# Altium PCB PCB layout.PcbDoc
Units mm, origin at the board's own origin, x right, y up, seen from the top; angles counter-clockwise.
Board outline 33.6 x 33.6 mm, 6 copper layers (Layer 1, Layer 2, Layer 3, Layer 4, Layer 5, Layer 6), stack 1.538 mm thick; 41 components, 40 nets, 194 pads, 107 vias.
Unrouted connection lines stored in the file: 41.
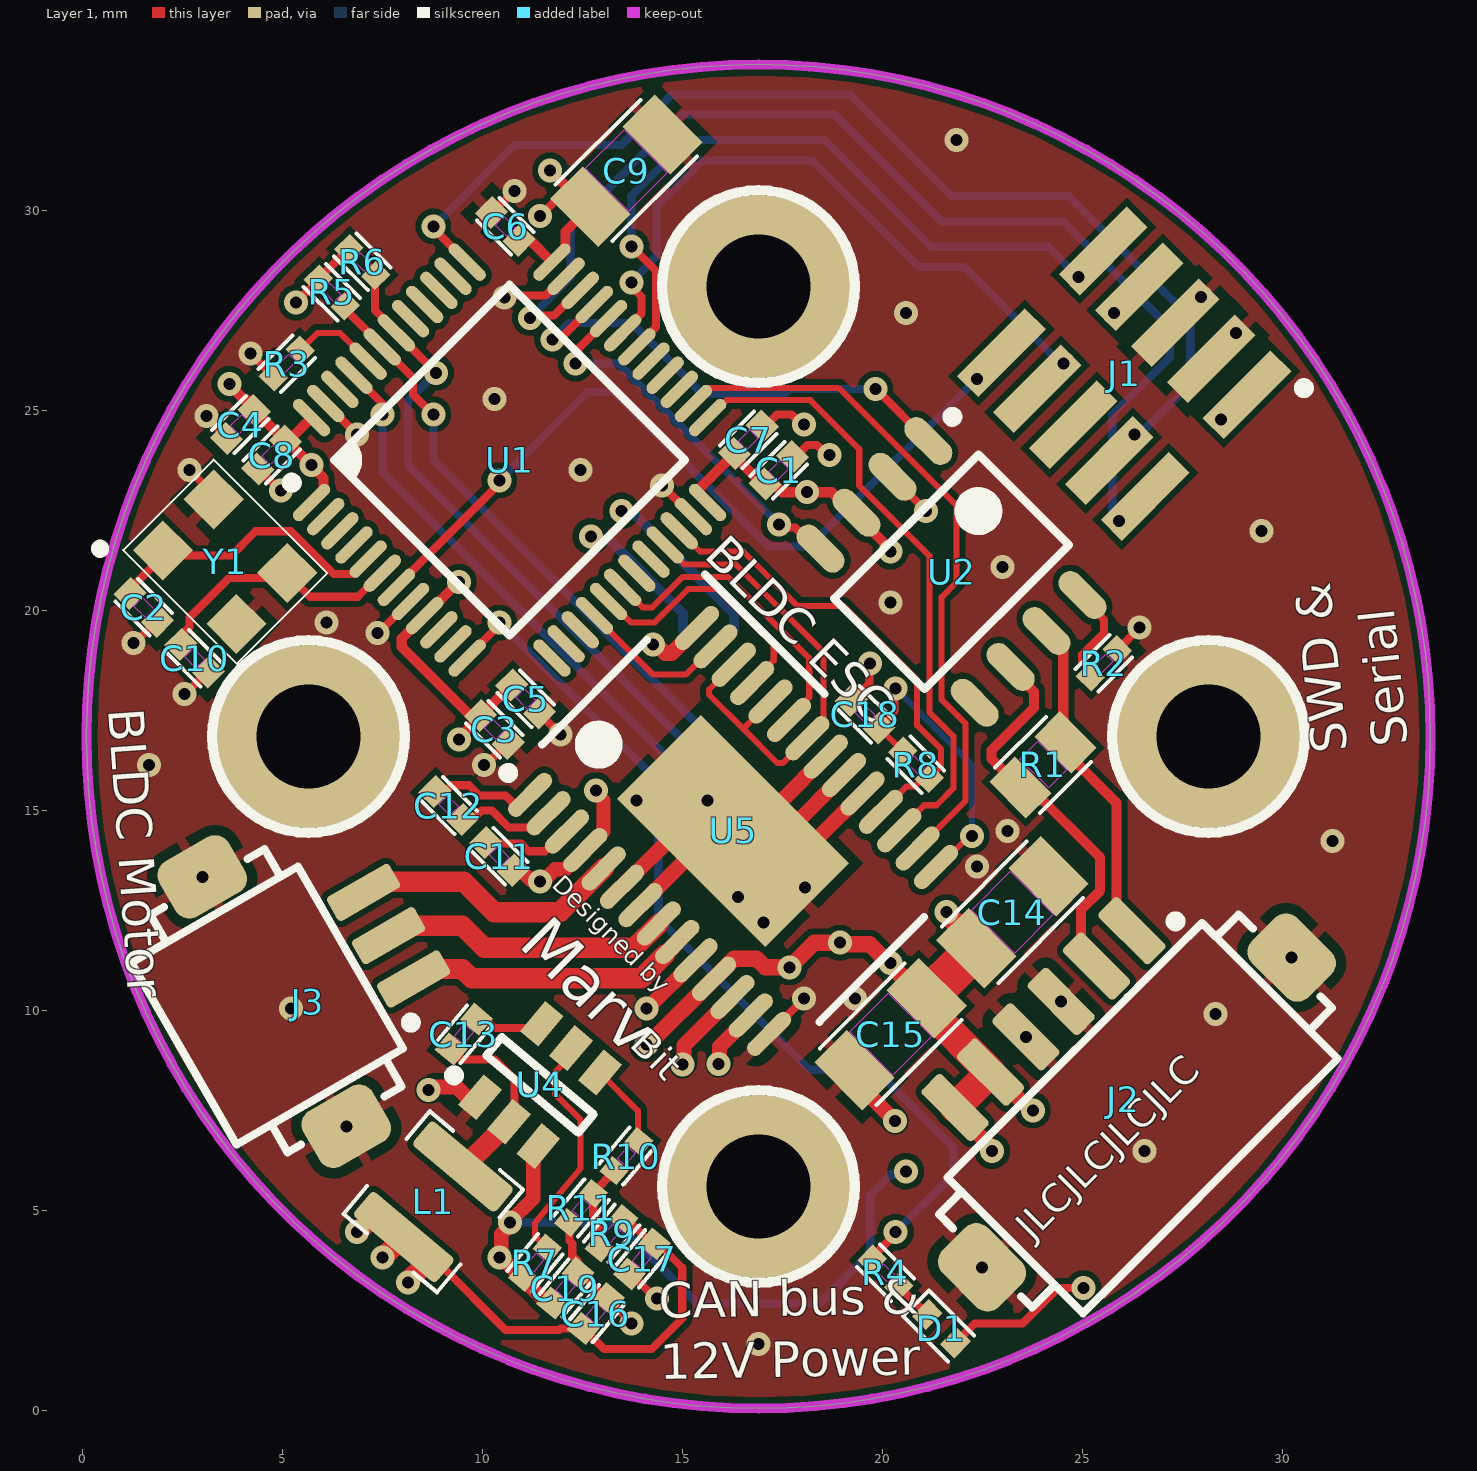
[diagram p0: Layer 1 view]
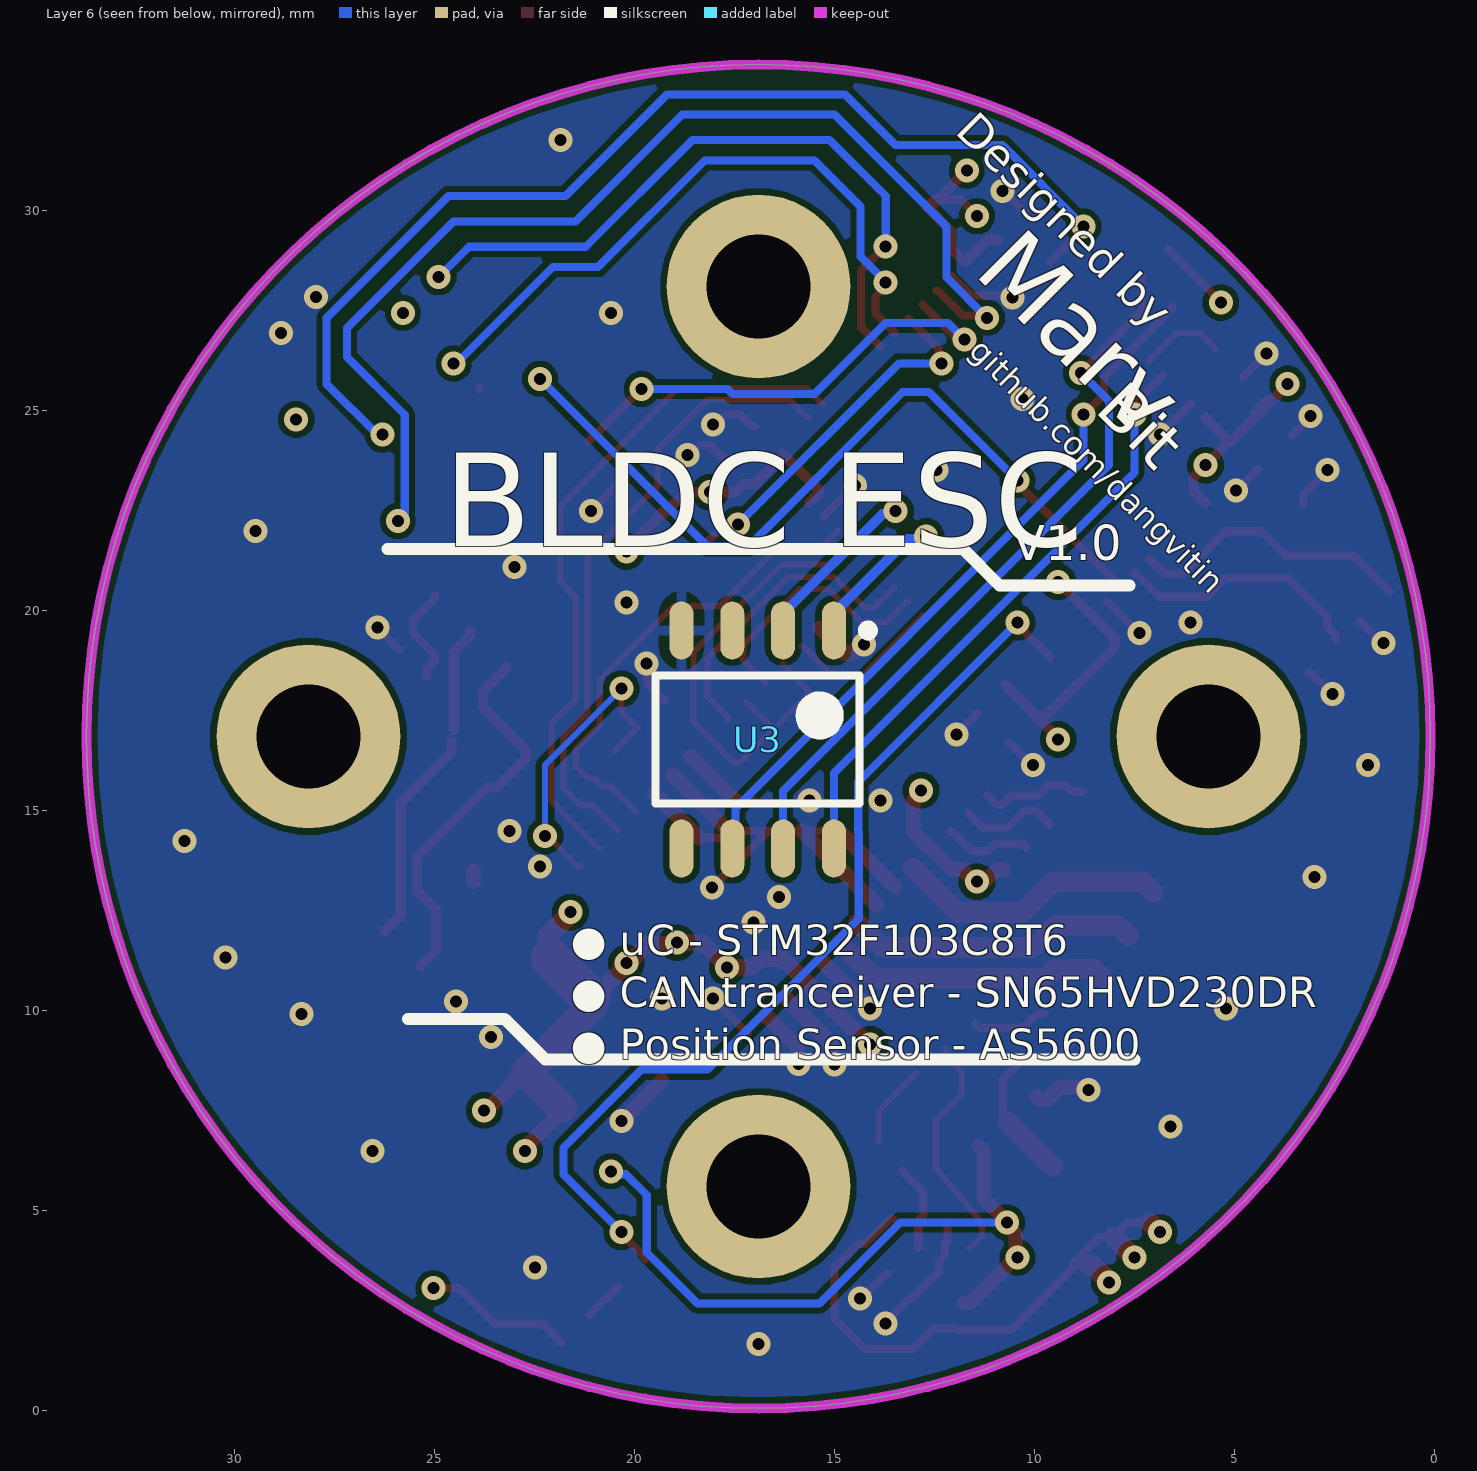
[diagram p1: Layer 6 view, seen from below]
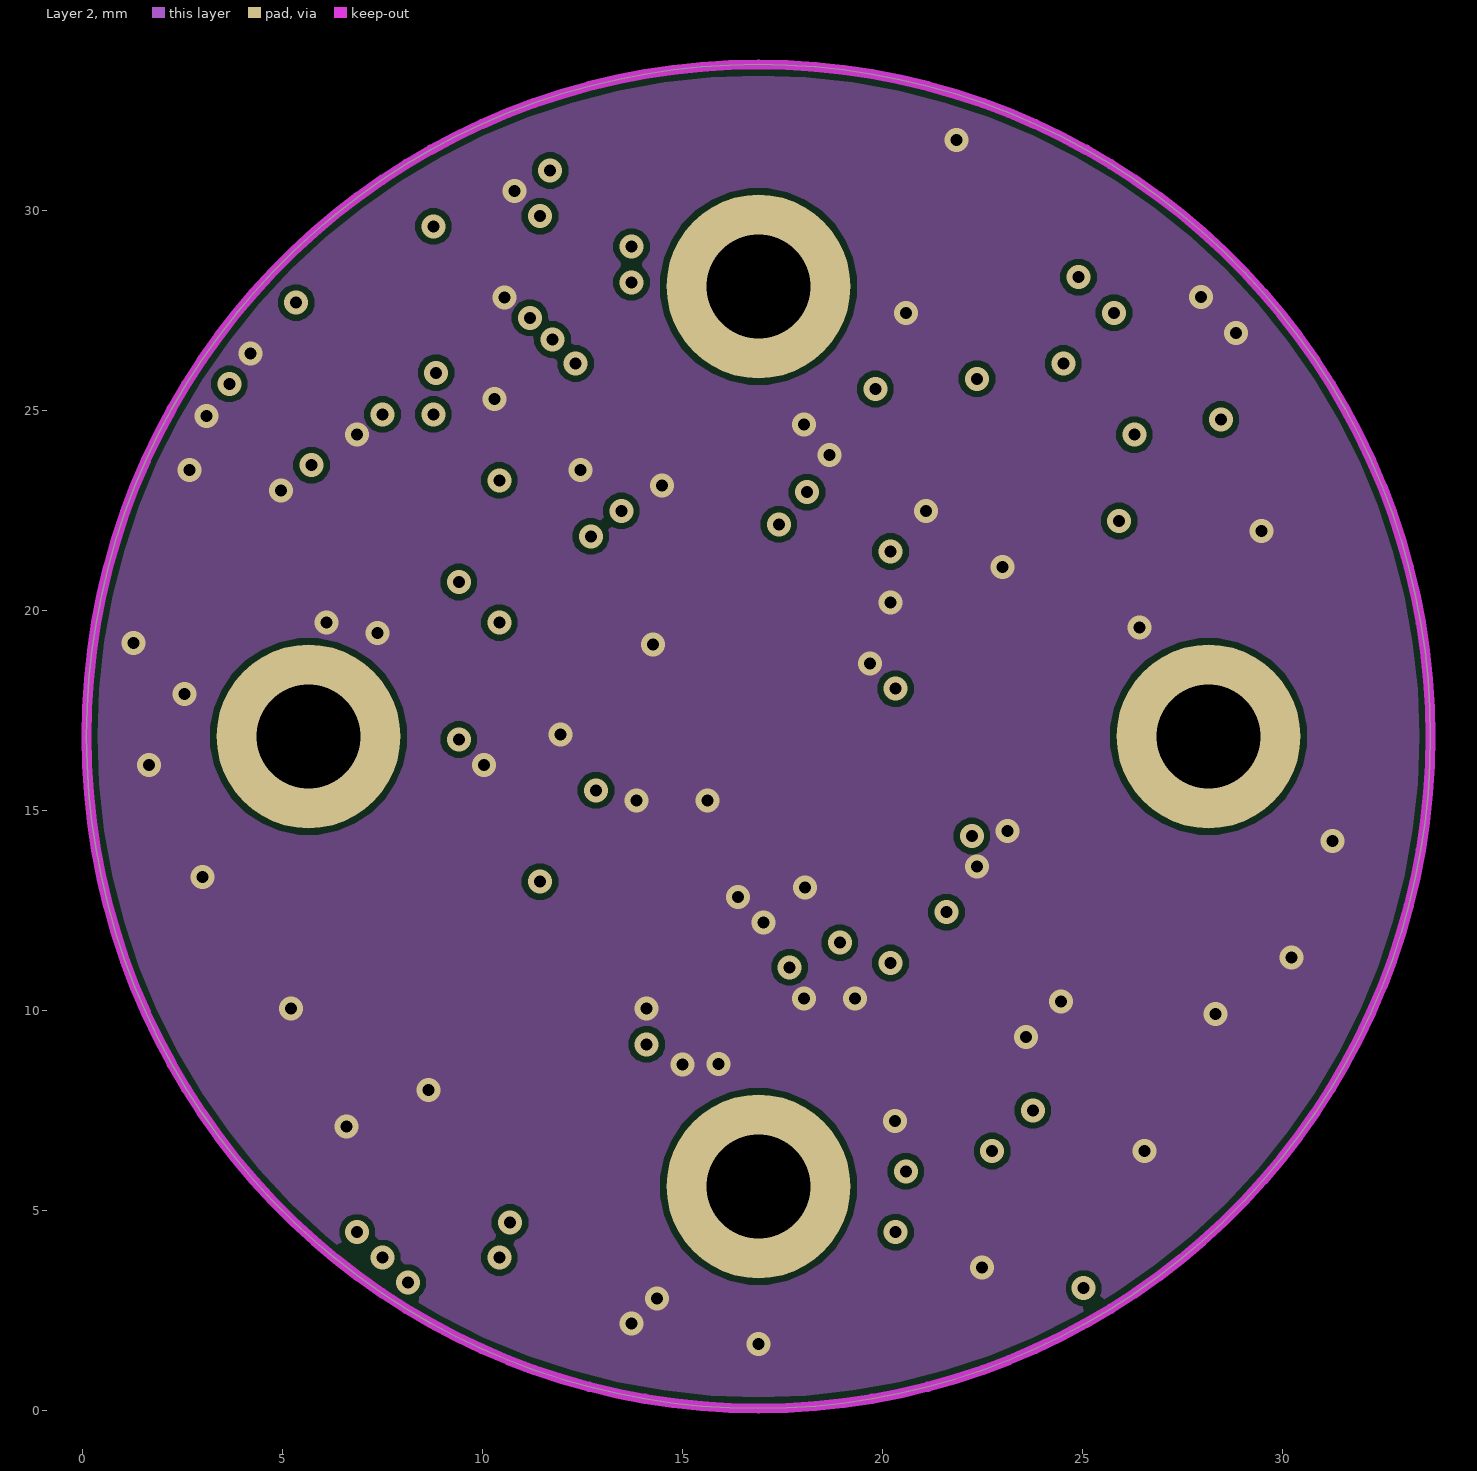
[diagram p2: Layer 2]
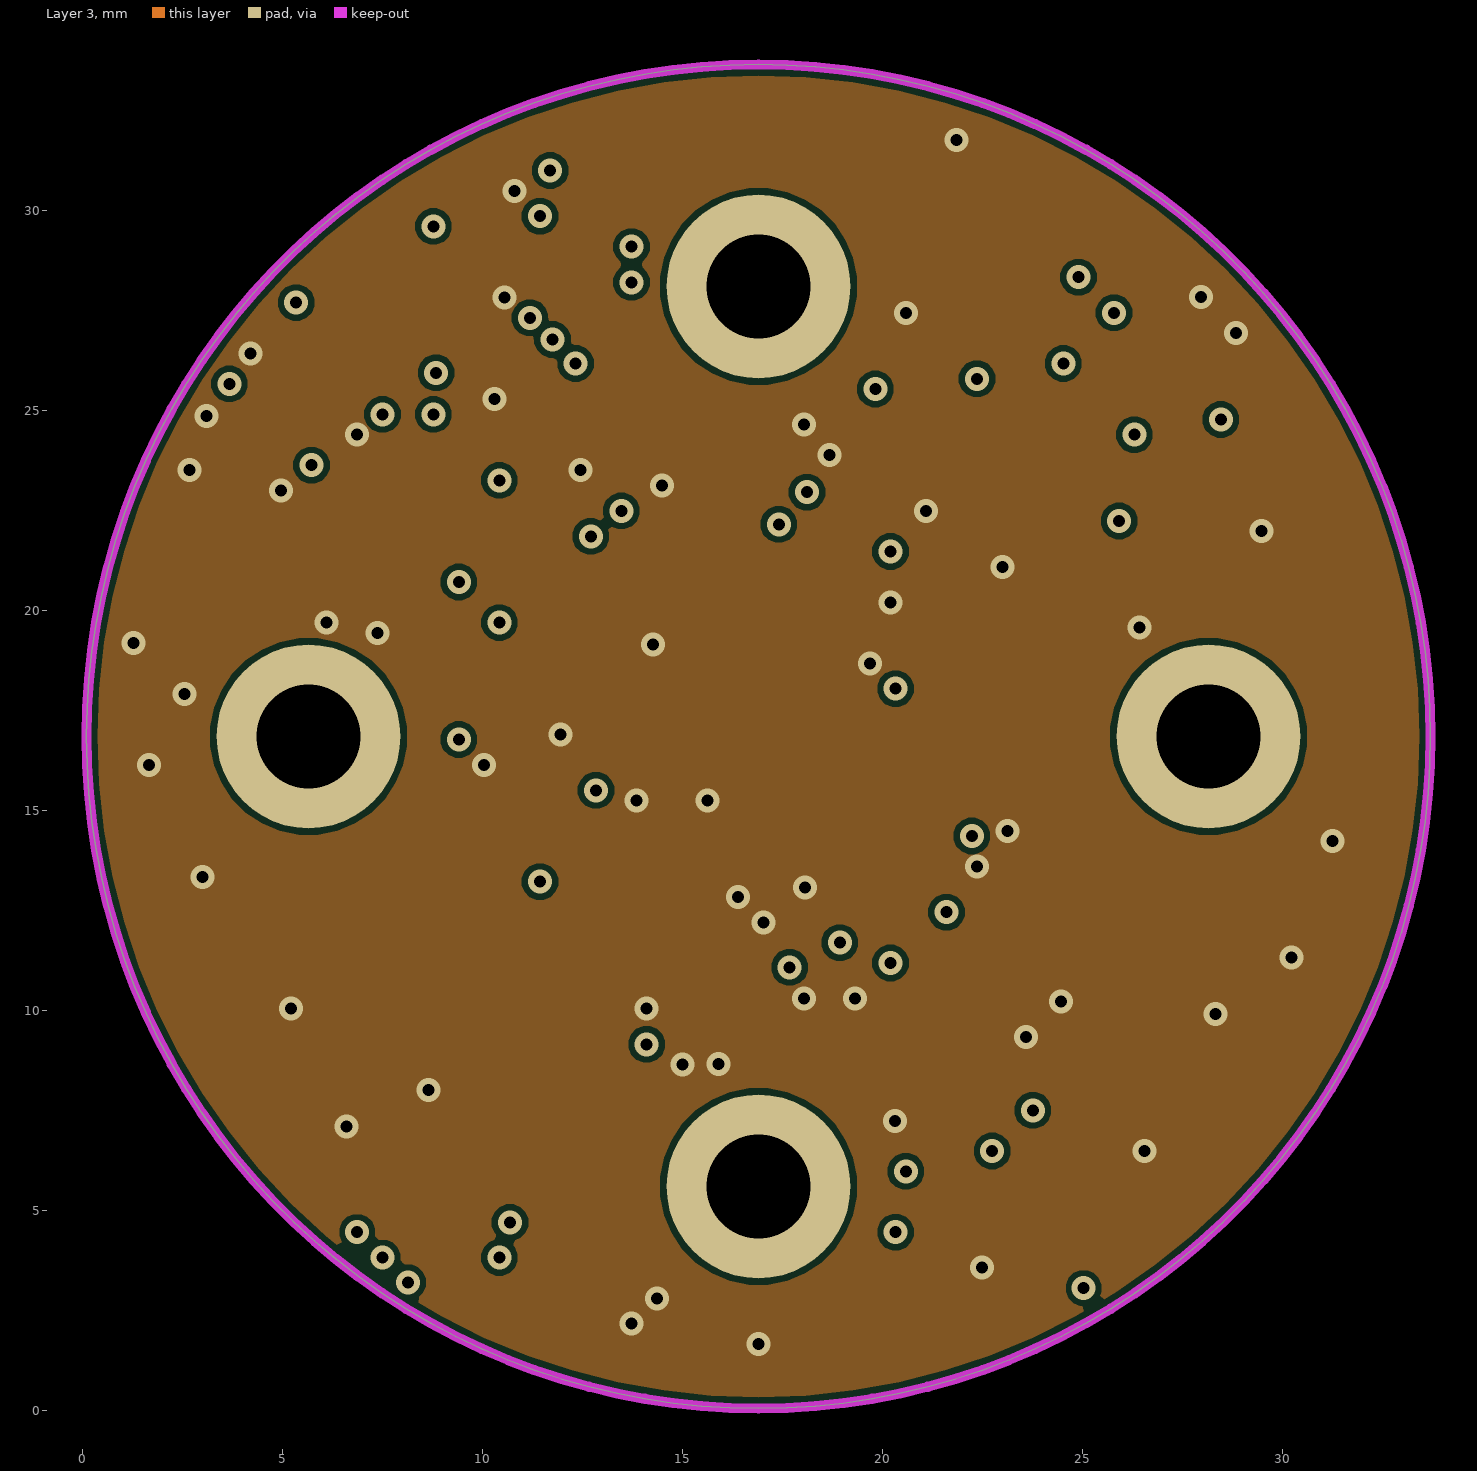
[diagram p3: Layer 3]
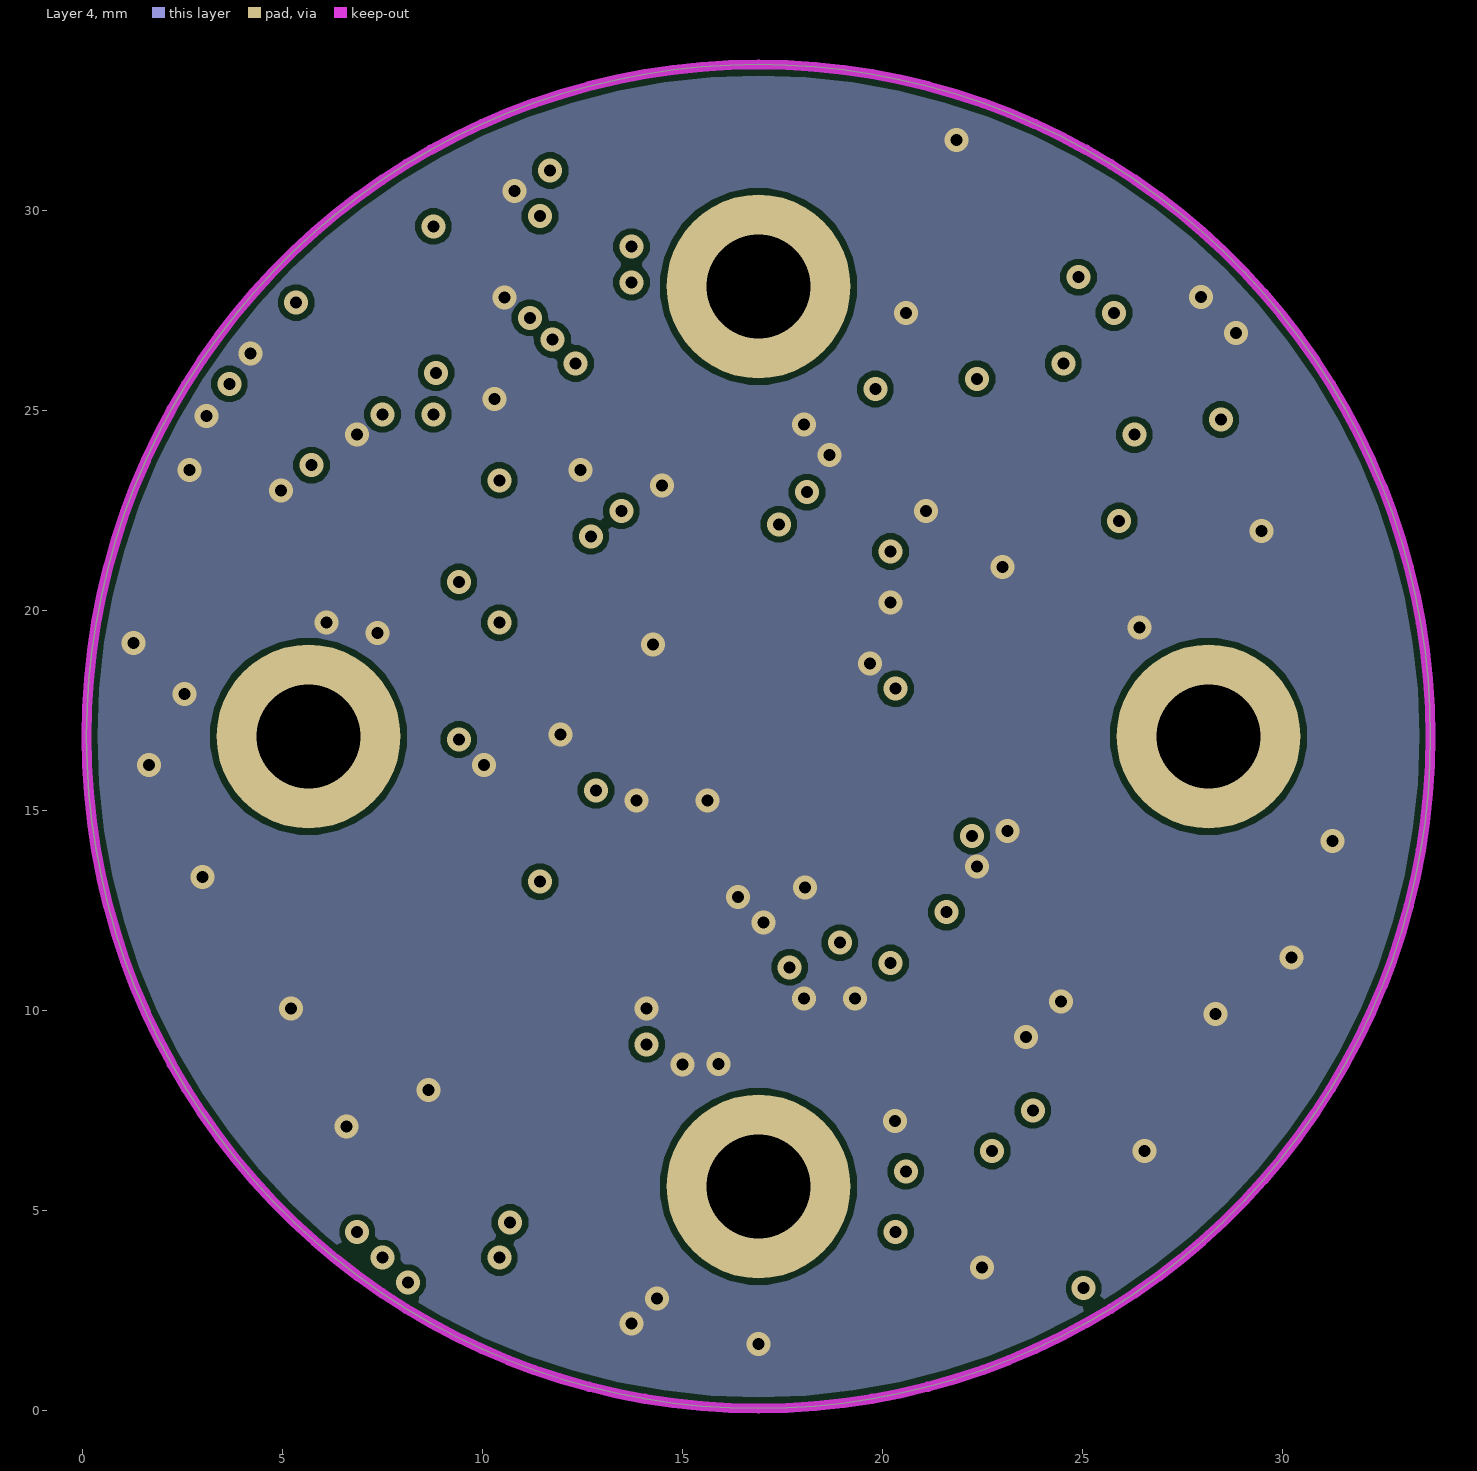
[diagram p4: Layer 4]
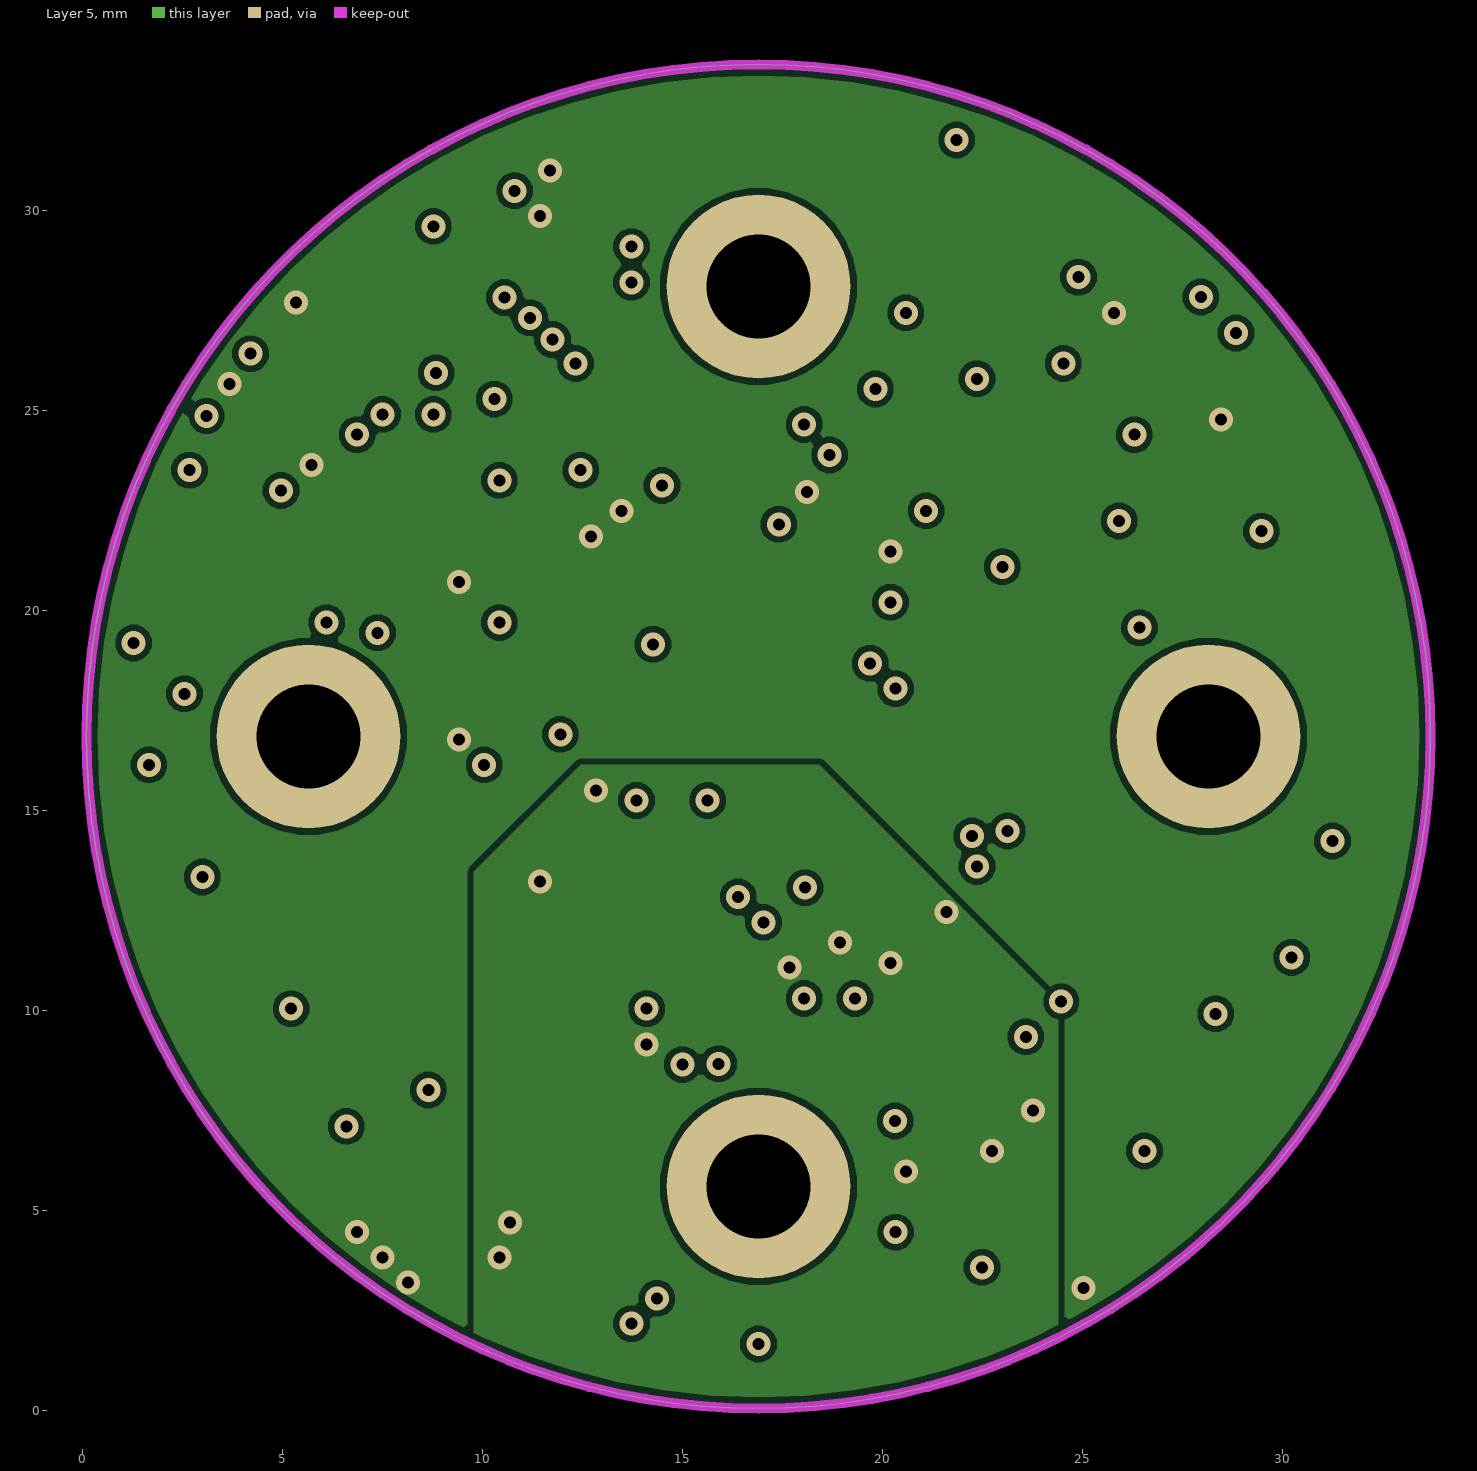
[diagram p5: Layer 5]
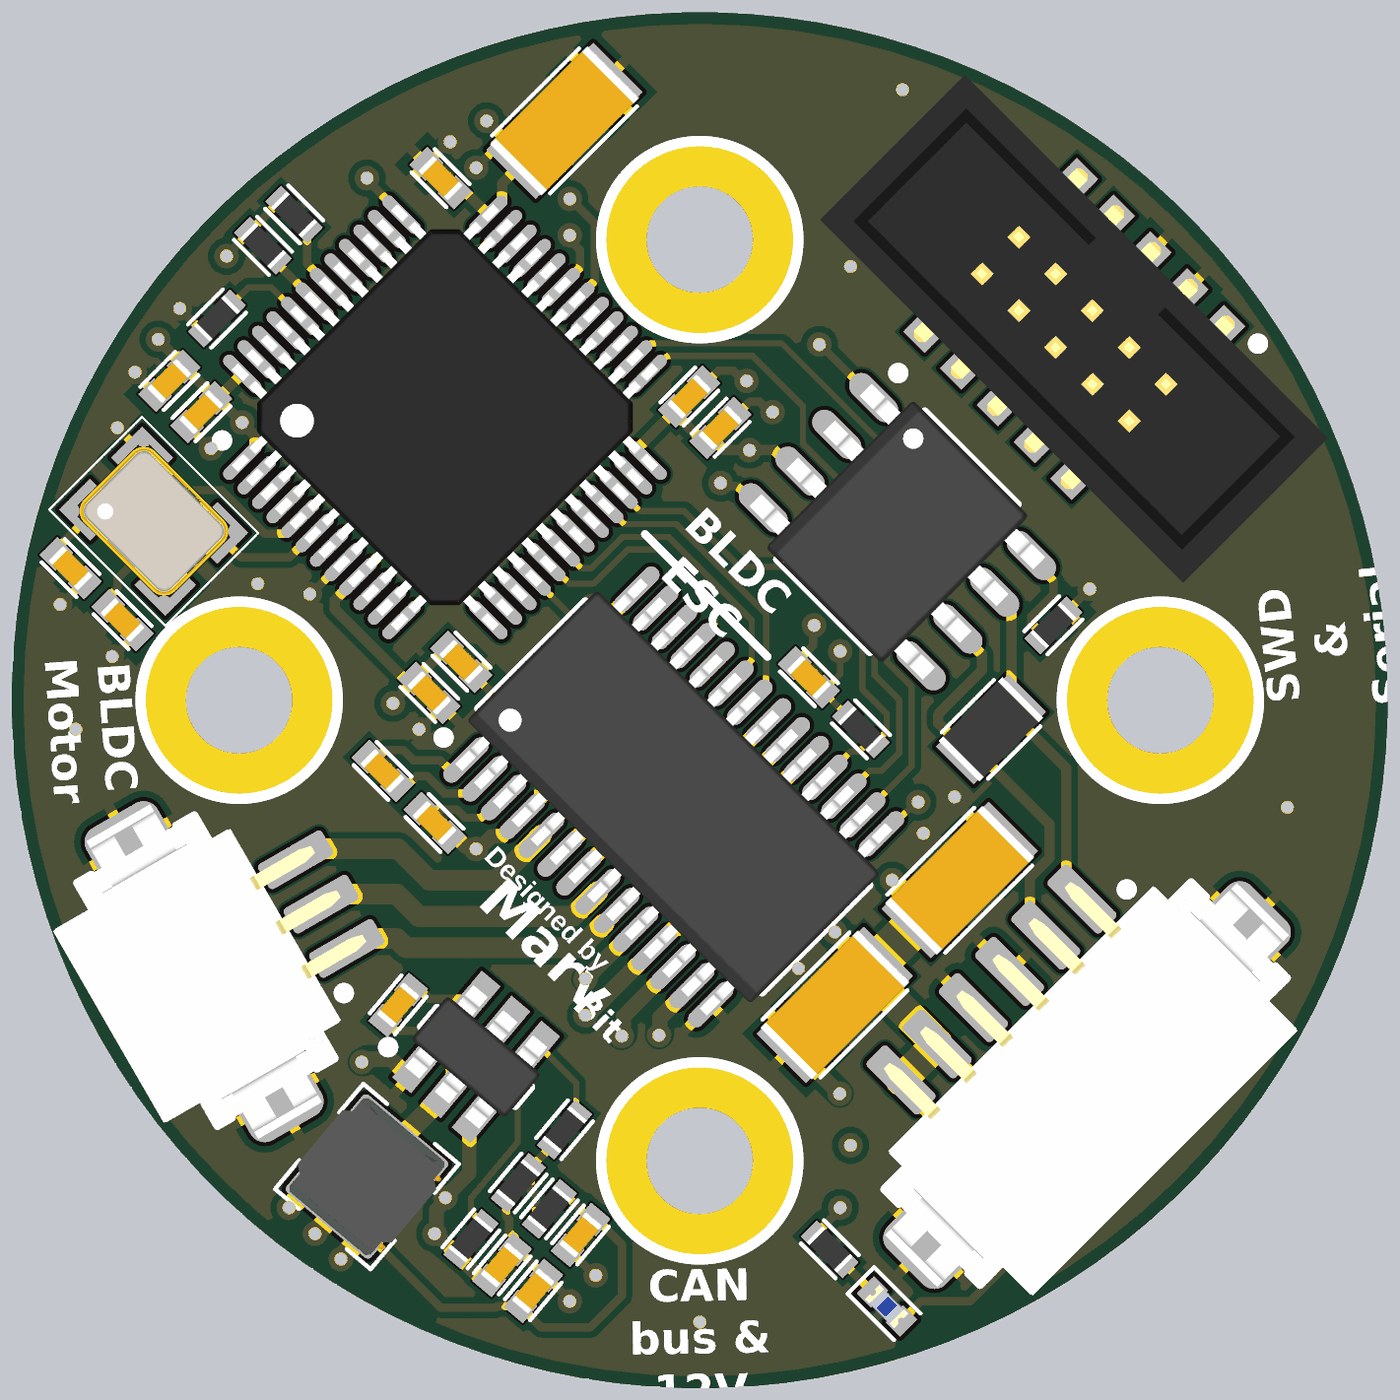
[diagram p6: 3D render of the assembled board from above, using the file's embedded part models]

## Layer stack, top to bottom
Top Solder: solder mask 0.0254, SM-001, Dk 4
Layer 1: signal copper 0.035
Dielectric 2: prepreg 0.0994, PP-017, Dk 4.3
Layer 2: signal copper 0.0152
Dielectric 6: core 0.55, PP-006, Dk 4.1
Layer 3: signal copper 0.0152
Dielectric 3: core 0.1088, Core-039, Dk 4.8
Layer 4: signal copper 0.0152
Dielectric 7: core 0.55, PP-006, Dk 4.1
Layer 5: signal copper 0.0152
Dielectric 4: prepreg 0.0994, PP-017, Dk 4.3
Layer 6: signal copper 0.035
Bottom Solder: solder mask 0.0254, SM-001, Dk 4

## Board outline
0.091,16.839 ccw(c16.891,16.839) 16.891,0.039 ccw(c16.891,16.839) 33.691,16.839 ccw(c16.891,16.839) 16.891,33.639 ccw(c16.891,16.839)

## Design rules (kind name [scope] priority, off if disabled: settings)
Clearance [All] p1: gap=0.152 ignorepadtopadclearanceinfootprint=TRUE except(0: Arc-Hole Track-Hole SMDPad-Hole THPad-Hole Via-Hole Fill-Hole Poly-Hole Region-Hole Text-Hole)
HoleSize [All] p1: absolutevalues=TRUE maxlimit=100 minlimit=0.3 maxpercent=80.000 minpercent=20.000
MinimumSolderMaskSliver [All] p1 off: minsoldermaskwidth=0.254
PolygonConnect [All] p1: thpad.connectstyle=Relief thpad.reliefconductorwidth=0.254 thpad.reliefentries=4 thpad.polygonreliefangle="90 Angle" thpad.airgapwidth=0.254 smdpad.connectstyle=Relief smdpad.reliefconductorwidth=0.254 smdpad.reliefentries=4 smdpad.polygonreliefangle="90 Angle" smdpad.airgapwidth=0.254 via.connectstyle=Direct via.reliefconductorwidth=0.254 via.reliefentries=4 via.polygonreliefangle="90 Angle" via.airgapwidth=0.254
RoutingVias [All] p1: holewidth=0.3 width=0.6 viastyle="Through Hole" minholewidth=0.3 minwidth=0.6 maxholewidth=100 maxwidth=100
SilkToSilkClearance [All] p1 off: silktosilkclearance=0.254
SilkToSolderMaskClearance [IsPad] p1 off: minsilkscreentomaskgap=0.254 clearancetoexposedcopper=TRUE
SolderMaskExpansion [All] p1: expansion=0.102 istentingtop=FALSE
Width [All] p1: maxlimit=2.54 minlimit=0.152 preferedwidth=0.203
26 further rules are at their usual default settings.

## Classes and differential pairs
component class Sch: C1 C2 C4 C5 C6 C7 C8 C9 C10 C11 C12 C13 C14 C16 C19 D1 J1 J2 J3 L1 R1 R2 R3 R4 R5 R6 R7 R9 R10 R11 U1 U2 U3 U5 Y1

## Components (designator, comment, footprint, x,y, rotation, side; value= is the part's Value field where it differs from the comment)
C1 "100nF" CAP-0402 17.399,23.495 r225 top
C2 "20pF" CAP-0402 1.524,20.066 r135 top
C3 "100nF" CAP-0402 10.287,17.018 r135 top
C4 "100nF" CAP-0402 3.937,24.638 r45 top
C5 "100nF" CAP-0402 11.069,17.78 r135 top
C6 "100nF" CAP-0402 10.561,29.591 r315 top
C7 "100nF" CAP-0402 16.637,24.257 r225 top
C8 "100nF" CAP-0402 4.719,23.876 r45 top
C9 "22uF" CAP-1206 13.589,30.988 r225 top
C10 "20pF" CAP-0402 2.794,18.796 r135 top
C11 "10nF" CAP-0402 10.414,13.843 r135 top
C12 "10nF" CAP-0402 9.144,15.113 r135 top
C13 "1uF" CAP-0402 9.525,9.398 r50 top
C14 "22uF" CAP-1206 23.241,12.446 r225 top
C15 "22uF" CAP-1206 20.193,9.398 r45 top
C16 "10uF" CAP-0402 12.827,2.413 r230 top
C17 "100nF" CAP-0402 13.98,3.781 r50 top
C18 "470nF" CAP-0402 19.558,17.399 r315 top
C19 "1uF" CAP-0402 12.065,3.048 r230 top
D1 "Blue" "LED-0402 BLUE" 21.463,2.032 r135 top
J1 "X1270WVS-2x05B-6TV01" SMD_IDC_1.27_10P 26.035,25.908 r135 top
J2 "1.25T-6P-WT" "Conn MX1.25 (6)" 26.421,7.369 r225 top
J3 "1.25T-3P-WT" "Conn MX1.25 (3)" 4.699,10.16 r120 top
L1 "4.7uH" IND-3012 8.763,5.207 r230 top
R1 "120R" RES-0805 24.003,16.129 r45 top
R2 "1K" RES-0402 25.527,18.669 r45 top
R3 "10K" RES-0402 5.1,26.162 r225 top
R4 "1K" RES-0402 20.066,3.429 r135 top
R5 "4.7K" RES-0402 6.223,27.94 r315 top
R6 "4.7K" RES-0402 6.985,28.702 r315 top
R7 "10K" RES-0402 11.303,3.683 r50 top
R8 "10K" RES-0402 20.828,16.129 r315 top
R9 "40.2K" RES-0402 13.218,4.416 r50 top
R10 "75K" RES-0402 13.589,6.35 r230 top
R11 "13K" RES-0402 12.456,5.051 r50 top
U1 "STM32F103C8T6" "ST LQFP-48 7x7MM" 10.668,23.749 r45 top
U2 "SN65HVD230DR" SOP-8 21.717,20.955 r315 top
U3 "AS5600-ASOT" SOP-8 16.911,16.764 r270 bottom
U4 "MP1470" SOT23-6 11.43,8.128 r50 top
U5 "DRV8313PWPR" TSSOP-28_PAD 16.256,14.478 r45 top
Y1 "8Mhz" Crystal-3225 3.556,21.209 r315 top

## Footprints (in the part's own frame and the unit in brackets; to place one, negate y for a bottom-side part, rotate by r counter-clockwise, add the part's x,y. Pads: shape width x height; smd on the part's side, far side on the other; paste and mask are expansions set on the pad)
CAP-0402 [mm] "Chip Capacitor, 2-Leads, Body 1.00x0.50mm, IPC High Density"
  rect 0.56x0.62 smd mask+0.051: 1(-0.49,0) 2(0.49,0)
  Layer 1 keep-out region: -0.2,0.152 0.2,0.152 0.2,-0.152 -0.2,-0.152
  silkscreen extent -0.6,-0.4 0.6,0.4, body extent -0.53,-0.28 0.53,0.28, height 0.5
CAP-1206 [mm] "Chip Capacitor, 2-Leads, Body 3.20x1.60mm, IPC High Density"
  rect 1.15x1.7 smd: 1(-1.275,0) 2(1.275,0)
  Layer 1 keep-out region: -0.686,0.762 0.686,0.762 0.686,-0.762 -0.686,-0.762
  silkscreen extent -1.5,-1 1.5,1, body extent -1.7,-0.9 1.7,0.9, height 1.6
"Conn MX1.25 (3)" [mm]
  rrect50% 1.6x2 smd: 0(-3.6,-0.1) 0(3.6,-0.1)
  rrect30% 0.7x1.8 smd: 1(-1.25,-3.4) 2(0,-3.4) 3(1.25,-3.4)
  silkscreen extent -3.43,-2.89 3.42,2.5, body extent -4.2,-3.9 4.2,2.6, height 3.59
"Conn MX1.25 (6)" [mm]
  rrect50% 1.6x2 smd: 0(-5.475,-0.1) 0(5.475,-0.1)
  rrect30% 0.7x1.8 smd: 1(-3.125,-3.4) 2(-1.875,-3.4) 3(-0.625,-3.4) 4(0.625,-3.4) 5(1.875,-3.4) 6(3.125,-3.4)
  silkscreen extent -5.3,-2.89 5.3,2.5, body extent -6.08,-3.9 6.08,2.6, height 3.59
Crystal-3225 [mm]
  rect 1.067x1.067 smd: 1(-1.3,-0.9) 2(1.3,-0.9) 3(1.3,0.9) 4(-1.3,0.9)
  silkscreen extent -2.54,-2.08 2.01,1.6, body extent -1.6,-1.24 1.6,1.26, height 0.61
IND-3012 [mm]
  rrect30% 0.8x2.7 smd: 1(-1.15,0) 2(1.15,0)
  silkscreen extent -1.68,-1.52 1.68,1.52, body extent -1.5,-1.5 1.5,1.5, height 1.45
"LED-0402 BLUE" [mm] "Chip Diode, 2-Leads, Body 1.00x0.50mm, IPC Medium Density"
  rect 0.5x0.6 smd: 1(0.5,0) 2(-0.5,0)
  silkscreen extent -0.7,-0.46 0.9,0.46, body extent -0.5,-0.25 0.5,0.25, height 0.21
RES-0402 [mm]
  rect 0.5x0.55 smd mask+0.051: 1(-0.475,0) 2(0.475,0)
  Layer 1 keep-out region: -0.2,0.127 0.2,0.127 0.2,-0.127 -0.2,-0.127
  silkscreen extent -0.6,-0.4 0.6,0.4, body extent -0.53,-0.28 0.53,0.28, height 0.35
RES-0805 [mm]
  rect 0.9x1.3 smd: 1(-0.8,0) 2(0.8,0)
  Layer 1 keep-out region: -0.305,0.508 0.33,0.508 0.33,-0.508 -0.305,-0.508
  silkscreen extent -0.9,-0.8 0.9,0.8, body extent -1.1,-0.7 1.1,0.7, height 0.4
SMD_IDC_1.27_10P [mm]
  rect 0.74x2.4 smd: 1(-2.54,-1.8) 2(-2.54,1.8) 3(-1.27,-1.8) 4(-1.27,1.8) 5(0,-1.8) 6(0,1.8) 7(1.27,-1.8) 8(1.27,1.8) 9(2.54,-1.8) 10(2.54,1.8)
  silkscreen extent -3.53,-3.02 -3.33,-2.82, body extent -6.27,-2.9 6.27,2.9, height 5.1
SOP-8 [mm]
  oval 1.45x0.6 smd: 1(-2.725,1.905) 2(-2.725,0.635) 3(-2.725,-0.635) 4(-2.725,-1.905) 5(2.725,-1.905) 6(2.725,-0.635) 7(2.725,0.635) 8(2.725,1.905)
  silkscreen extent -2.85,-2.55 1.6,2.88, body extent -3,-2.55 3,2.55, height 1.5
SOT23-6 [mm] "SOT23, 6-Leads, Body 2.90x2.45mm, Pitch 0.95mm, IPC Medium Density"
  rect 1x0.6 smd: 1(-1.2,0.95) 2(-1.2,0) 3(-1.2,-0.95) 4(1.2,-0.95) 5(1.2,0) 6(1.2,0.95)
  silkscreen extent -1.32,-1.5 0.3,1.92, body extent -1.3,-1.5 1.3,1.5, height 1.1
"ST LQFP-48 7x7MM" [mm] "LQFP, 48-Leads, Body 7.00x7.00mm, Pitch 0.50mm, IPC Medium Density"
  oval 1.2x0.3 smd: 1(-4.25,2.75) 2(-4.25,2.25) 3(-4.25,1.75) 4(-4.25,1.25) 5(-4.25,0.75) 6(-4.25,0.25) 7(-4.25,-0.25) 8(-4.25,-0.75) 9(-4.25,-1.25) 10(-4.25,-1.75) 11(-4.25,-2.25) 12(-4.25,-2.75) 25(4.25,-2.75) 26(4.25,-2.25) 27(4.25,-1.75) 28(4.25,-1.25) 29(4.25,-0.75) 30(4.25,-0.25) 31(4.25,0.25) 32(4.25,0.75) 33(4.25,1.25) 34(4.25,1.75) 35(4.25,2.25) 36(4.25,2.75)
  oval 0.3x1.2 smd: 13(-2.75,-4.25) 14(-2.25,-4.25) 15(-1.75,-4.25) 16(-1.25,-4.25) 17(-0.75,-4.25) 18(-0.25,-4.25) 19(0.25,-4.25) 20(0.75,-4.25) 21(1.25,-4.25) 22(1.75,-4.25) 23(2.25,-4.25) 24(2.75,-4.25) 37(2.75,4.25) 38(2.25,4.25) 39(1.75,4.25) 40(1.25,4.25) 41(0.75,4.25) 42(0.25,4.25) 43(-0.25,4.25) 44(-0.75,4.25) 45(-1.25,4.25) 46(-1.75,4.25) 47(-2.25,4.25) 48(-2.75,4.25)
  silkscreen extent -4.37,-3.1 3.1,3.57, body extent -4.51,-4.51 4.51,4.51, height 1.55
TSSOP-28_PAD [mm]
  oval 1.4x0.4 smd: 1(-2.95,4.225) 2(-2.95,3.575) 3(-2.95,2.925) 4(-2.95,2.275) 5(-2.95,1.625) 6(-2.95,0.975) 7(-2.95,0.325) 8(-2.95,-0.325) 9(-2.95,-0.975) 10(-2.95,-1.625) 11(-2.95,-2.275) 12(-2.95,-2.925) 13(-2.95,-3.575) 14(-2.95,-4.225) 15(2.95,-4.225) 16(2.95,-3.575) 17(2.95,-2.925) 18(2.95,-2.275) 19(2.95,-1.625) 20(2.95,-0.975) 21(2.95,-0.325) 22(2.95,0.325) 23(2.95,0.975) 24(2.95,1.625) 25(2.95,2.275) 26(2.95,2.925) 27(2.95,3.575) 28(2.95,4.225)
  rect 2.97x5.25 smd: 29(0,0)
  silkscreen extent -3.07,-4.9 1.85,5.12, body extent -3.2,-4.9 3.2,4.9, height 1.2

## Part data
C1 C3 C4 C5 C6 C7 C8: library part 0402B104K160CT, "100nF ±10% 16V X7R 0402 Multilayer Ceramic Capacitors MLCC - SMD/SMT RoHS", Manufacture=WALSIN, Package=0402, Voltage=16V, Capacitor value=100nF, Component type=Capacitor, Manufacture part=0402B104K160CT, Package / Case=0402
C2 C10: library part CL05C200JB5NNNC, "20 pF ±5% 50V Ceramic Capacitor C0G, NP0 0402 (1005 Metric)", Manufacture=Samsung, Package=0402, Voltage=50V, Capacitor value=20pF, Component type=Capacitor, Manufacture part=CL05C200JB5NNNC, Package / Case=0402
C9 C14 C15: library part CL31A226KAHNNNE, "X5R 25V ±10% 22uF 1206 Multilayer Ceramic Capacitors MLCC - SMD/SMT ROHS", Manufacture=Samsung, Package=1206, Package / Case=0402, Voltage=25V, Capacitor value=22uF, Component type=Capacitor, Manufacture part=CL31A226KAHNNNE
C11 C12: library part 0402B103J500CT, "10nF ±5% 50V X7R 0402 Multilayer Ceramic Capacitors MLCC - SMD/SMT RoHS", Manufacture=WALSIN, Package=0402, Voltage=50V, Capacitor value=10nF, Component type=Capacitor, Manufacture part=0402B103J500CT, Package / Case=0402
C13 C19: library part 0402X105K250CT, "25V 1uF X5R ±10% 0402 Multilayer Ceramic Capacitors MLCC - SMD/SMT ROHS", Manufacture=WALSIN, Package=0402, Voltage=25V, Capacitor value=1uF, Component type=Capacitor, Manufacture part=0402X105K250CT, Package / Case=0402
C16: library part CL05A106MP5NUNC, "10V 10uF X5R ±20% 0402 Multilayer Ceramic Capacitors MLCC - SMD/SMT ROHS", Manufacture=Samsung, Package=0402, Voltage=10V, Capacitor value=10uF, Component type=Capacitor, Manufacture part=CL05A106MP5NUNC, Package / Case=0402
C17: library part 0402X104K250CT, "100nF ±10% 25V X5R 0402 Multilayer Ceramic Capacitors MLCC - SMD/SMT RoHS", Manufacture=WALSIN, Package=0402, Voltage=25V, Capacitor value=100nF, Component type=Capacitor, Manufacture part=0402X104K250CT, Package / Case=0402
C18: library part 0402X474K250CT, "470nF X5R 25V ±10% 470nF 0402 Multilayer Ceramic Capacitors MLCC - SMD/SMT ROHS", Manufacture=WALSIN, Package=0402, Voltage=25V, Capacitor value=470nF, Component type=Capacitor, Manufacture part=0402X474K250CT, Package / Case=0402
D1: library part 0402-blue, "Blue 0402 Light Emitting Diodes (LED) ROHS", Manufacture=XINGLIGHT, Package=0402, Color=Blue, Component type=Led, Manufacture part=0402-blue, Package / Case=0402
J1: "SMD,P=1.27mm IDC Connectors ROHS", Manufacture="XKB Connectivity", Datasheet=https://datasheet.lcsc.com/lcsc/2201191230_XKB-Connectivity-X1270WVS-2x05B-6TV01_C2962219.pdf, Manufacture part=X1270WVS-2x05B-6TV01, Type="Pin Header"
J2: "MX1.25 Header Male Pin 0.049\"(1.25mm) 6 P=1.25mm Wire To Board / Wire To Wire Connector RoHS", Manufacture="Korean Hroparts Elec", Datasheet=https://datasheet.lcsc.com/lcsc/1811151526_Korean-Hroparts-Elec-1-25T-6P-WT_C97377.pdf, Manufacture part=1.25T-6P-WT, Type=MX1.25
J3: "MX1.25 Header Male Pin 0.049\"(1.25mm) 3 SMD,P=1.25mm Wire To Board / Wire To Wire Connector RoHS", Manufacture="Korean Hroparts Elec", Datasheet=https://datasheet.lcsc.com/lcsc/2008221834_Korean-Hroparts-Elec-1-25T-3P-WT_C707315.pdf, Manufacture part=1.25T-3P-WT, Type=MX1.25
L1: library part SWPA3012S4R7MT, "Inductor 30x30x12, 4.7±20% , 1.24A", Manufacture=SUNLORD, Package=3012, DCR="0.12 Ω", Inductance value=4.7uH, Irms max=1.24A, Manufacture part=SWPA3012S4R7MT
R1: library part AC0805FR-7W120RL, "250mW Thick Film Resistors 150V ±100ppm/℃ ±1% -55℃~+155℃ 120Ω 0805 Chip Resistor - Surface Mount ROHS", Manufacture=YAGEO, Package=0805, Package / Case=0201, Component type=Resistor, Manufacture part=AC0805FR-7W120RL, Resistor value=120R
R2 R4: library part WR04X1001FTL, "1kΩ ±1% 1/16W ±100ppm/℃ 0402 Chip Resistor - Surface Mount RoHS", Manufacture=WALSIN, Package=0402, Package / Case=0201, Component type=Resistor, Manufacture part=WR04X1001FTL, Resistor value=1K
R3 R7 R8: library part WR04X1002FTL, "10kΩ ±1% 1/16W ±100ppm/℃ 0402 Chip Resistor - Surface Mount RoHS", Manufacture=WALSIN, Package=0402, Package / Case=0201, Component type=Resistor, Manufacture part=WR04X1002FTL, Resistor value=10K
R5 R6: library part WR04X4701FTL, "4.7kΩ ±1% 1/16W ±100ppm/℃ 0402 Chip Resistor - Surface Mount RoHS", Manufacture=WALSIN, Package=0402, Package / Case=0201, Component type=Resistor, Manufacture part=WR04X4701FTL, Resistor value=4.7K
R9: library part RC0402FR-0740K2L, "62.5mW Thick Film Resistors ±1% 40.2kΩ 0402 Chip Resistor - Surface Mount ROHS", Manufacture=YAGEO, Package=0402, Package / Case=0201, Component type=Resistor, Manufacture part=RC0402FR-0740K2L, Resistor value=40.2K
R10: library part WR04X7502FTL, "75kΩ ±1% 1/16W ±100ppm/℃ 0402 Chip Resistor - Surface Mount RoHS", Manufacture=WALSIN, Package=0402, Package / Case=0201, Component type=Resistor, Manufacture part=WR04X7502FTL, Resistor value=75K
R11: library part RC0402FR-0713KL, "62.5mW Thick Film Resistors ±100ppm/℃ ±1% 13kΩ 0402 Chip Resistor - Surface Mount ROHS", Manufacture=YAGEO, Package=0402, Package / Case=0201, Component type=Resistor, Manufacture part=RC0402FR-0713KL, Resistor value=13K
U1: "32-Bit FLASH ARM® Cortex®-M3 72MHz 2V ~ 3.6V LQFP-48_7x7x05P ST Microelectronics RoHS", Manufacture=STMicroelectronics, Package=LQFP-48, Component type=Microcontroller, ComponentLink2Description=Datasheet, ComponentLink2URL=http://www.st.com/st-web-ui/static/active/en/resource/technical/document/datasheet/CD00161566.pdf, Datasheet=https://datasheet.lcsc.com/lcsc/1811151642_STMicroelectronics-STM32F103C8T6_C8734.pdf, Manufacture part=STM32F103C8T6, Package / Case=LQFP-48
U2: "3.3-V CAN Bus Transceivers", Manufacture="Texas Instruments", Package=SOP-8, Datasheet=https://www.ti.com/lit/ds/symlink/sn65hvd230.pdf?ts=1662996416638, Manufacture part=SN65HVD230DR
U3: "0°~360° SOP-8 Position Sensor ROHS", Manufacture=AMS, Package=SOP-8, Datasheet=https://datasheet.lcsc.com/lcsc/2304140030_AMS-AS5600-ASOT_C499458.pdf, Manufacture part=AS5600-ASOT
U4: "High-Efficiency, 2A, 16V, 500kHz Synchronous, Step-Down Converter In a 6-Pin TSOT 23", Manufacture="Advanced Monolithic Systems", Package=SOT23-6, Datasheet=https://www.monolithicpower.com/en/documentview/productdocument/index/version/2/document_type/Datasheet/lang/en/sku/MP1470/document_id/327/, Manufacture part=MP1470, Type=Buck
U5: "BLDC 8V~60V Parallel TSSOP-28-EP Motor Driver ICs ROHS", Manufacture="Texas Instruments", Package=TSSOP-28-EP, Datasheet=https://datasheet.lcsc.com/lcsc/1809141420_Texas-Instruments-DRV8313PWPR_C92482.pdf, Manufacture part=DRV8313PWPR
Y1: library part X3S008000BK1H-U, "8MHz ±10ppm 20pF 400Ω SMD,3.2x2.5mm Crystals RoHS", Load Capacitance=12pF, Manufacture="HELE(Harmony Elec)", Package=3225, Crystal value=8Mhz, Manufacture part=X3S008000BK1H-U

## Free pads (board coordinates)
  round 4.6 hole 2.6 mask+0.102: ""(5.641,16.839) ""(16.891,5.589) ""(16.891,28.089) ""(28.141,16.839)

## Via types
v1: diameter 0.6, hole 0.3, Layer 1 to Layer 6, tented both sides, 107 vias

## Nets (pads, with @x,y where several pads share a name; then routed paths per layer and width w, separated by ;. In a path a pad name is that pad's centre, name@x,y a point inside that pad or via, vN(x,y) a via of type N, cw(c..) or ccw(c..) an arc to the next point about the centre after c; other vN are vias at no path point)
3V3: C1.2 C3.2 C4.2 C5.2 C6.2 C7.2 C8.2 C9.2 C16.2 C17.2 D1.2 J1.1 J1.7 L1.2 R5.1 R6.1 R9.2 U1.1 U1.9 U1.24 U1.36 U1.48 U2.3 U3.1 U3.2 | length 53.6
  Layer 1 w0.203: v1(5.334,27.686) 5.334,27.704 5.887,28.258 R5.1 R6.1 R6.1@6.668,29.038 ; L1.2@7.096,4.683 7.666,4.683 L1.2 ; L1.2@8.009,4.326 L1.2 ; L1.2@8.636,3.683 9.017,3.683 8.374,4.326 L1.2 ; L1.2@8.954,3.62 10.568,2.005 11.911,2.005 11.944,2.038 C16.2 ; v1(11.43,29.845) 11.845,30.26 12.412,30.26 12.514,30.26 C9.2 ; C16.2@12.493,2.057 C16.2 ; R9.2 13.597,4.78 14.221,4.156 C17.2 14.386,4.156 14.986,3.556 14.986,2.286 14.224,1.524 13.026,1.524 C16.2 ; D1.2 22.297,2.159 23.495,2.159 24.384,3.048 v1(25.019,3.048)
  Layer 1 w0.254: v1(3.663,25.654) 3.663,25.629 C4.2@4.283,25.009 ; 4.049,25.238 4.176,25.238 C4.2@4.472,24.943 ; C4.2@4.115,25.177 C4.2@4.283,25.009 ; C4.2@4.23,25.058 4.938,24.349 C8.2 5.115,24.222 v1(5.715,23.622) 5.715,23.608 6.018,23.305 6.018,22.988 U1.1 ; C4.2 C4.2@4.283,25.009 ; C8.2@5.131,24.222 U1.48 ; v1(9.398,16.764) 9.398,16.793 9.941,17.335 C3.2 ; v1(9.398,20.701) 9.393,20.701 8.552,19.86 U1.9 7.974,19.287 7.974,19.077 9.705,17.346 9.922,17.346 C3.2 ; C5.2 10.713,18.126 9.951,17.364 C3.2 ; C6.2 10.919,29.256 11.171,29.256 U1.36 12.065,29.035 12.065,29.464 C9.2 ; v1(11.684,30.988) 12.412,30.26 C9.2@12.586,30.086 ; U1.24 15.375,22.931 15.375,22.995 C7.2@16.275,23.895 ; C7.2 16.291,23.847 16.926,23.212 16.926,23.149 C1.2 17.285,23.149 17.487,22.947 v1(18.105,22.947) 18.723,22.947 19.237,22.433 U2.3 19.341,22.374 20.193,21.522 v1(20.193,21.463)
  Layer 1 w0.381: L1.2@8.636,3.615 L1.2@8.636,3.683
  Layer 1 w0.508: v1(6.858,4.445) L1.2@7.096,4.683 ; v1(7.493,3.81) L1.2@8.009,4.326 ; v1(8.128,3.189) 8.128,3.214 8.529,3.615 L1.2@8.636,3.615
  Layer 6 w0.254: v1(12.7,21.844) 12.776,21.768 13.152,21.768 15.006,19.914 U3.1 ; v1(13.462,22.479) 13.538,22.403 13.787,22.403 16.276,19.914 U3.2
  other v1: 28.448,24.765 25.781,27.432
CAN_H: J2.1 R1.2 U2.7 | length 8
  Layer 1 w0.254: U2.7 24.093,19.37 24.511,18.952 R1.2@24.511,17.006 ; R1.2 24.569,16.452 25.838,15.183 25.838,12.372 J2.1
CAN_L: J2.2 R1.1 U2.6 | length 9.8
  Layer 1 w0.254: U2.6 23.195,18.542 23.78,17.957 23.78,17.557 22.717,16.494 22.717,16.284 R1.1 23.68,15.563 25.431,13.812 25.431,12.985 24.954,12.508 24.954,11.488 J2.2
CAN_RX: U1.32 U2.4 | length 9.5
  Layer 1 w0.203: v1(12.319,26.162) 12.395,26.238 12.395,26.537 U1.32 ; v1(17.399,22.144) 17.475,22.068 17.802,22.068 18.336,21.535 U2.4
  Layer 6 w0.203: v1(12.319,26.162) 13.381,26.162 v1(17.399,22.144)
CAN_TX: U1.33 U2.1 | length 12.3
  Layer 1 w0.203: v1(11.741,26.764) 11.816,26.84 11.991,26.84 U1.33 ; v1(19.812,25.527) 19.826,25.527 21.124,24.229 U2.1
  Layer 6 w0.203: v1(11.741,26.764) 12.155,27.178 13.716,27.178 15.494,25.4 17.536,25.4 17.663,25.527 v1(19.812,25.527)
DIR: U1.45 U3.8 | length 15.2
  Layer 1 w0.203: U1.45 7.493,25.156 v1(7.493,24.892)
  Layer 6 w0.203: v1(7.493,24.892) 7.493,23.435 15.006,15.922 U3.8
DRV_EN: U1.21 U5.22 U5.24 U5.26 | length 12.8
  Layer 1 w0.152: U1.21 15.046,21.139 16.326,21.139 18.513,18.952 18.513,17.195 U5.22 17.492,16.174 17.366,16.174 16.51,17.03 ; U5.26 15.654,18.012 15.654,17.886 16.51,17.03 ; U5.24 16.51,17.03
FAULT: R8.2 U1.22 U5.18 | length 11.9
  Layer 1 w0.152: U1.22 15.429,21.463 16.51,21.463 17.877,20.096 19.02,20.096 20.858,18.258 20.858,17.115 21.459,16.514 21.459,16.088 R8.2 20.992,15.793 20.785,15.586 20.582,15.586 U5.18
GND: C1.1 C2.1 C3.1 C4.1 C5.1 C6.1 C7.1 C8.1 C9.1 C10.1 C14.1 C15.1 C16.1 C17.1 C18.1 C19.1 J1.3 J1.5 J2.0 J2.3 J2.4 J3.0 R2.2 R3.2 R11.1 U1.8 U1.23 U1.35 U1.47 U2.2 U3.4 U4.1 U5.6 U5.7 U5.10 U5.12 U5.13 U5.14 U5.19 U5.20 U5.21 U5.28 U5.29 Y1.2 Y1.4 | length 49.4
  Layer 1 w0.203: v1(1.27,19.177) 1.299,19.177 1.841,19.72 C2.1 ; v1(2.54,17.907) 2.569,17.907 3.111,18.45 C10.1 ; v1(2.667,23.495) 3.27,22.892 Y1.4@3.27,22.638 ; v1(3.095,24.853) 3.095,24.82 C4.1@3.554,24.361 ; v1(4.191,26.408) 4.764,25.835 R3.2 ; C8.1@4.391,23.53 4.934,22.987 v1(4.953,22.987) ; U1.47 6.075,25.163 6.855,24.384 v1(6.858,24.384) ; v1(7.366,19.431) 7.388,19.431 8.171,20.213 U1.8 ; v1(10.033,16.129) 10.062,16.129 10.604,16.672 C3.1 ; C6.1 10.234,29.937 10.776,30.48 v1(10.795,30.48) ; v1(10.541,27.813) 10.587,27.859 11.57,27.859 12.056,28.345 U1.35 ; C5.1 11.415,17.414 v1(11.938,16.891) ; R11.1 12.167,4.671 12.167,4.234 12.234,4.167 12.234,3.859 12.38,3.712 C19.1 12.443,3.423 13.104,2.763 13.142,2.763 13.716,2.189 v1(13.716,2.159) ; C17.1 13.704,3.406 14.316,2.794 v1(14.351,2.794) ; v1(14.478,23.114) 14.481,23.114 15.261,22.335 U1.23 ; U5.29@14.877,14.478 15.796,14.478 U5.29 U5.29@16.637,14.478 ; C7.1 17.065,24.603 17.354,24.892 17.717,24.892 17.971,24.638 v1(18.034,24.638) ; U5.29@17.018,15.24 17.032,15.226 U5.29@17.464,15.226 ; U5.14 17.158,9.408 18.034,10.284 v1(18.034,10.287) ; C1.1 17.827,23.841 18.116,24.13 18.352,24.13 18.606,23.876 v1(18.669,23.876) ; v1(18.054,13.059) 18.054,13.061 U5.29@16.637,14.478 ; U5.29@18.383,14.307 17.806,14.307 17.635,14.478 U5.29@16.637,14.478 ; C18.1 19.24,17.745 19.661,18.166 19.661,18.645 v1(19.685,18.669) ; U2.2 20.239,23.326 21.082,22.484 v1(21.082,22.479) ; R2.2 v1(26.416,19.558)
  Layer 1 w0.381: v1(8.636,8.001) 8.695,8.001 8.771,8.077 9.347,8.077 9.66,7.764 9.875,7.764 U4.1 ; U5.6 U5.29@14.877,14.478 ; U5.7 U5.29@15.796,14.478 ; v1(14.097,10.033) 14.104,10.033 15.314,11.243 U5.10 ; v1(14.254,19.143) 14.334,19.143 14.556,18.921 14.724,18.921 U5.28 ; v1(14.986,8.636) 15.028,8.678 15.028,9.113 U5.12 ; v1(15.896,8.657) 15.917,8.678 15.917,9.083 U5.13 ; U5.29@17.464,15.226 U5.21 ; U5.29@17.635,14.478 U5.20 ; U5.29@18.383,14.307 U5.19 ; C15.1@19.317,8.242 19.317,8.221 v1(20.309,7.228) ; C14.1@24.016,13.221 C14.1@24.016,13.475
  other v1: 16.891,1.651 22.479,3.568 26.543,6.477 6.586,7.092 23.575,9.331 28.321,9.906 5.207,10.033 24.459,10.215 19.304,10.287 30.222,11.311 17.018,12.192 16.383,12.827 2.986,13.328 22.352,13.589 31.242,14.224 23.114,14.478 13.843,15.24 15.621,15.24 1.651,16.129 6.096,19.685 20.193,20.193 22.987,21.082 29.464,21.971 12.446,23.495 10.287,25.273 28.829,26.924 20.574,27.432 27.951,27.824 21.844,31.75
LED: R4.2 U1.12 | length 23.7
  Layer 1 w0.203: U1.12 9.607,18.825 10.414,19.632 v1(10.414,19.685) ; R4.2 19.73,3.81 20.32,4.4 v1(20.32,4.445)
  Layer 6 w0.203: v1(10.414,19.685) 14.397,15.702 14.397,14.455 14.385,14.444 14.385,12.285 18.161,8.509 19.812,8.509 21.763,6.558 21.763,5.888 v1(20.32,4.445)
MOTOR_A: J3.3 U5.5 | length 6.9
  Layer 1 w0.508: J3.3 7.284,13.208 9.525,13.208 10.287,12.446 11.926,12.446 U5.5
MOTOR_B: J3.2 U5.8 | length 7.3
  Layer 1 w0.406: 13.787,11.564 13.802,11.564
  Layer 1 w0.508: J3.2 7.892,12.109 9.481,12.109 10.033,11.557 13.78,11.557 13.787,11.564 ; 13.802,11.564 U5.8
MOTOR_C: J3.1 U5.9 | length 6.9
  Layer 1 w0.406: U5.9@14.732,11.56 14.732,11.575 U5.9
  Layer 1 w0.508: J3.1 8.516,11.025 9.49,11.025 9.719,10.795 13.967,10.795 U5.9@14.551,11.38
NetC11_2: C11.2 U5.3 | length 2.2
  Layer 1 w0.203: C11.2@10.195,14.062 10.3,14.168 10.951,14.168 11.149,13.97 11.558,13.97 12.048,14.46 U5.3
NetC12_1: C12.1 U5.2 | length 2.5
  Layer 1 w0.203: C12.1@9.617,14.64 9.964,14.986 10.227,14.986 10.647,14.566 11.289,14.566 U5.2
NetC12_2: C12.2 U5.1 | length 2.8
  Layer 1 w0.203: C12.2 9.05,15.459 9.211,15.621 9.652,15.621 9.906,15.367 10.563,15.367 10.802,15.128 10.931,15.128 U5.1
NetC13_1: C13.1 L1.1 U4.2 | length 4.6
  Layer 1 w0.203: C13.1@9.083,9.15 C13.1 9.47,8.763 10.287,8.763 10.787,8.263 U4.2@10.787,7.313
  Layer 1 w0.508: L1.1@9.538,6.088 U4.2
NetC13_2: C13.2 U4.6 | length 1.9
  Layer 1 w0.203: C13.2@9.744,9.9 9.923,9.9 10.275,9.549 11.365,9.549 U4.6
NetC18_2: C18.2 R8.1 U5.15 | length 7.7
  Layer 1 w0.152: v1(20.32,18.034) 20.32,17.468 C18.2 R8.1 ; U5.15 21.39,13.576 22.165,14.351 v1(22.225,14.351)
  Layer 6 w0.152: v1(20.32,18.034) 22.225,16.129 v1(22.225,14.351)
NetD1_1: D1.1 R4.1 | length 1
  Layer 1 w0.203: R4.1 D1.1
NetR2_1: R2.1 U2.8 | length 2.6
  Layer 1 w0.203: U2.8 24.991,20.293 25.527,19.757 25.527,19.431 24.986,18.89 24.986,18.722 25.191,18.517 R2.1
NetR3_1: R3.1 U1.44 | length 2.2
  Layer 1 w0.152: R3.1 5.862,26.924 6.432,26.924 U1.44
NetR7_2: R7.2 U4.5 | length 6
  Layer 1 w0.152: R7.2 11.303,4.352 11.303,4.68 11.338,4.722 12.41,5.999 ccw(c12.294,6.098) 12.411,6 12.446,6.042 12.446,7.255 11.811,7.89 11.811,8.454 12.201,8.844 U4.5
NetR9_1: R9.1 R10.2 R11.2 | length 2.2
  Layer 1 w0.203: R9.1 12.897,4.068 12.897,4.737 12.762,4.873 12.762,5.14 12.778,5.156 12.762,5.172 R11.2 12.762,5.439 13.284,5.962 R10.2
NetR10_1: R10.1 U4.4 | length 2.1
  Layer 1 w0.152: U4.4 13.878,7.487 13.878,6.73 R10.1
NRST: J1.10 U1.7 | length 19.9
  Layer 1 w0.203: U1.7 7.84,20.593 10.414,23.168 v1(10.414,23.241)
  Layer 6 w0.203: v1(10.414,23.241) 12.624,25.451 13.284,25.451 17.145,21.59 18.161,21.59 v1(22.352,25.781)
OSC-IN: C2.2 U1.5 Y1.1 | length 7.2
  Layer 1 w0.203: C2.2@1.114,20.459 2.02,21.365 3.713,21.365 4.319,21.971 5.207,21.971 6.273,20.905 6.738,20.905 7.106,21.274 U1.5
OSC-OUT: C10.2 U1.6 Y1.3 | length 6.3
  Layer 1 w0.203: C10.2@2.469,19.267 2.469,19.379 2.667,19.577 2.667,19.812 3.654,20.799 5.215,20.799 5.682,20.332 6.871,20.332 7.46,20.921 U1.6
PWM_A: U1.16 U5.27 | length 3.9
  Layer 1 w0.152: U1.16 14.264,18.385 15.07,18.385 15.777,19.092 U5.27
PWM_B: U1.17 U5.25 | length 6.5
  Layer 1 w0.152: U1.17 13.183,20.213 13.711,19.685 14.29,19.685 15.129,20.523 15.876,20.523 17.272,19.127 17.272,18.739 16.733,18.201 U5.25
PWM_C: U1.18 U5.23 | length 7.8
  Layer 1 w0.152: U1.18 13.997,20.066 14.24,20.066 15.002,20.828 16.129,20.828 18.161,18.796 18.161,17.82 17.653,17.312 U5.23
RESET: U1.26 U5.16 | length 17.4
  Layer 1 w0.152: U1.26 15.304,25.163 15.695,25.554 18.896,25.554 21.844,22.606 21.844,20.701 21.468,20.325 21.468,17.763 22.069,17.162 22.069,15.235 U5.16
SCL: R6.2 U1.42 U3.7 | length 18.6
  Layer 1 w0.203: R6.2 7.303,28.348 7.303,27.494 7.84,26.957 7.84,26.927 8.832,25.935 v1(8.832,25.931)
  Layer 6 w0.203: v1(8.832,25.931) 8.128,25.227 8.128,23.622 16.276,15.474 U3.7
SDA: R5.2 U1.43 U3.6 | length 18.1
  Layer 1 w0.203: R5.2 6.559,27.531 7.486,26.604 U1.43 8.255,25.808 8.255,25.392 8.755,24.892 v1(8.763,24.892)
  Layer 6 w0.203: v1(8.763,24.892) 8.763,23.749 17.47,15.042 17.47,14.115 U3.6
SLEEP: U1.25 U5.17 | length 15.7
  Layer 1 w0.152: U1.25 15.658,24.81 16.097,25.249 18.185,25.249 19.41,24.024 19.41,23.111 21.163,21.359 21.163,17.445 21.764,16.844 21.764,15.541 21.342,15.119 21.033,15.119 U5.17
SWCLK: J1.4 U1.37 | length 27.4
  Layer 1 w0.203: v1(8.763,29.591) 8.763,29.543 U1.37
  Layer 6 w0.203: v1(8.763,29.591) 10.795,31.623 13.462,31.623 14.732,32.893 19.177,32.893 21.717,30.353 24.638,30.353 27.686,27.305 27.686,25.654 26.416,24.384 v1(26.289,24.384)
SWDIO: J1.2 U1.34 | length 28.1
  Layer 1 w0.203: v1(11.176,27.305) 11.234,27.363 11.781,27.363 12.41,27.992 U1.34
  Layer 6 w0.203: v1(11.176,27.305) 12.192,28.321 12.192,29.591 14.986,32.385 18.796,32.385 21.463,29.718 24.511,29.718 27.178,27.051 27.178,26.324 25.735,24.881 25.735,22.398 v1(25.908,22.225)
UART_RX: J1.8 U1.31 | length 16.5
  Layer 1 w0.203: U1.31 13.496,26.943 13.97,27.417 13.97,27.833 13.716,28.087 v1(13.716,28.194) ; J1.8 J1.8@23.882,25.533
  Layer 6 w0.203: v1(13.716,28.194) 13.716,28.218 14.337,28.839 14.337,30.085 15.494,31.242 18.234,31.242 20.901,28.575 22.035,28.575 24.448,26.162 v1(24.511,26.162)
UART_TX: J1.9 U1.30 | length 17.5
  Layer 1 w0.203: v1(13.716,29.083) 13.733,29.083 14.224,28.592 14.224,28.584 14.326,28.483 14.326,27.079 13.85,26.604 U1.30 ; v1(24.892,28.321) J1.9@24.892,28.357
  Layer 6 w0.203: v1(13.716,29.083) 13.71,29.089 13.71,30.347 15.113,31.75 18.542,31.75 21.209,29.083 24.13,29.083 v1(24.892,28.321)
V_MAIN: C11.1 C14.2 C15.2 C19.2 J2.5 J2.6 R7.1 U4.3 U5.4 U5.11 | length 39.7
  Layer 1 w0.203: J2.6@21.807,7.483 J2.6 ; J2.5 J2.5@22.743,8.447 ; v1(22.733,6.477) v1@22.733,6.557 ; v1@23.697,7.493 v1(23.749,7.493)
  Layer 1 w0.356: v1@10.669,4.699 11.258,5.288 11.258,6.47 U4.3 ; v1(10.679,4.688) 10.679,4.622 10.461,4.404 10.461,3.857 v1(10.414,3.81) 10.459,3.81 11.596,2.673 C19.2 ; C11.1 10.782,13.518 10.926,13.518 11.189,13.255 11.383,13.255 v1(11.43,13.208) 11.496,13.208 11.806,13.518 12.066,13.518 13.02,14.471 13.02,15.235 12.827,15.428 v1(12.827,15.494)
  Layer 1 w0.381: J2.6@21.807,7.483 v1@22.733,6.557 ; J2.5@22.743,8.447 v1@23.697,7.493
  Layer 1 w0.406: v1(14.097,9.144) 14.139,9.144 U5.11 16.279,11.284 16.843,11.284 17.059,11.068 v1(17.672,11.068) 18.288,11.684 v1(18.923,11.684) 18.96,11.647 19.67,11.647 20.167,11.15 C15.2@21.056,10.261
  Layer 1 w0.508: v1@21.59,12.421 C14.2@22.188,11.824
  Layer 1 w0.762: C15.2 21.095,10.044 J2.5 J2.6
  Layer 1 w1.016: C15.2 C14.2@22.085,11.29
  Layer 6 w0.203: v1(10.679,4.688) 13.346,4.688 15.367,2.667 18.415,2.667 19.685,3.937 19.685,5.377 20.201,5.893 20.498,5.893 v1(20.574,5.969)
  other v1: 20.193,11.176 21.59,12.446
pads on no net: J1.6 U1.2 U1.3 U1.4 U1.10 U1.11 U1.13 U1.14 U1.15 U1.19 U1.20 U1.27 U1.28 U1.29 U1.38 U1.39 U1.40 U1.41 U1.46 U2.5 U3.3 U3.5

## Polygon pours and split planes (outlines as drawn)
3V3 on Layer 5 "3V3_L05_P003" (solid, pour order 3): 0.091,16.839 ccw(c16.891,16.839) 16.891,0.039 ccw(c16.891,16.839) 33.691,16.839 ccw(c16.891,16.839) 16.891,33.639 ccw(c16.891,16.839)
V_MAIN on Layer 5 "V_MAIN_L05_P001" (solid, remove dead copper, pour order 1): 24.384,10.16 24.384,-0.127 9.779,-0.127 9.779,13.462 12.446,16.129 18.415,16.129
GND on Layer 2 "GND_L02_P000" (solid, pour order 0): 0.091,16.839 ccw(c16.891,16.839) 16.891,0.039 ccw(c16.891,16.839) 33.691,16.839 ccw(c16.891,16.839) 16.891,33.639 ccw(c16.891,16.839)
GND on Layer 6 "GND_L06_P006" (solid, remove dead copper, pour order 6): 0.091,16.839 ccw(c16.891,16.839) 16.891,0.039 ccw(c16.891,16.839) 33.691,16.839 ccw(c16.891,16.839) 16.891,33.639 ccw(c16.891,16.839)
GND on Layer 3 "GND_L03_P008" (solid, pour order 8): 0.091,16.839 ccw(c16.891,16.839) 16.891,0.039 ccw(c16.891,16.839) 33.691,16.839 ccw(c16.891,16.839) 16.891,33.639 ccw(c16.891,16.839)
GND on Layer 4 "GND_L04_P009" (solid, pour order 9): 0.091,16.839 ccw(c16.891,16.839) 16.891,0.039 ccw(c16.891,16.839) 33.691,16.839 ccw(c16.891,16.839) 16.891,33.639 ccw(c16.891,16.839)
GND on Layer 1 "GND_L01_P007" (solid, remove dead copper, pour order 7): 0.091,16.839 ccw(c16.891,16.839) 16.891,0.039 ccw(c16.891,16.839) 33.691,16.839 ccw(c16.891,16.839) 16.891,33.639 ccw(c16.891,16.839)

## Keep-outs
Keep-Out Layer:
  circle w0.254: c16.891,16.839 r16.8

## Silkscreen, mask and mechanical layers (free items; w line width, h text height)
Top Overlay:
  circle w0.254: c16.891,5.589 r2.408
  circle w0.254: c28.141,16.839 r2.408
  circle w0.254: c16.891,28.089 r2.408
  circle w0.254: c5.641,16.839 r2.408
  lines w0.2: 15.557,20.892 18.542,17.907
  text "BLDC ESC" at 15.294,21.136 h1.5 r315
  text "BLDC Motor" at 0.332,17.489 h1.52 r274
  text "SWD & / Serial" at 33.435,16.671 h1.52 r96
  text "Designed by" at 11.597,12.993 h0.76 r315
  text "Marv" at 10.582,11.344 h2 r315
  text "Bit" at 13.47,8.947 h1.2 r315
  text "JLCJLCJLCJLC" at 23.74,4.202 h0.7 r45
  text "CAN bus & / 12V Power" at 14.435,0.465 h1.52 r1
Bottom Overlay:
  lines w0.3: 7.493,8.763 22.225,8.763 23.241,9.779 25.654,9.779 ; 7.62,20.611 10.86,20.611 11.775,21.526 26.162,21.526
  text "Designed by" at 12.192,31.75 h1.4 r45
  text "Marv" at 11.941,28.026 h3 r45
  text "github.com/dangvitin" at 11.811,26.289 h1 r45
  text "Bit" at 8.782,24.701 h2 r45
  text "V1.0" at 10.541,20.956 h1.5
  text "BLDC ESC" at 24.765,20.828 h4
  text "● uC - STM32F103C8T6 / ● CAN tranceiver - SN65HVD230DR / ● Position Sensor - AS5600" at 21.59,8.514 h1.3